# Altium PCB PCB.PcbDoc
Units mm, origin at the board's own origin, x right, y up, seen from the top; angles counter-clockwise.
Board outline 60.43 x 99.97 mm, 2 copper layers (Top Layer, Bottom Layer), stack 0.533 mm thick; 109 components, 71 nets, 350 pads, 354 vias.
Unrouted connection lines stored in the file: 10.
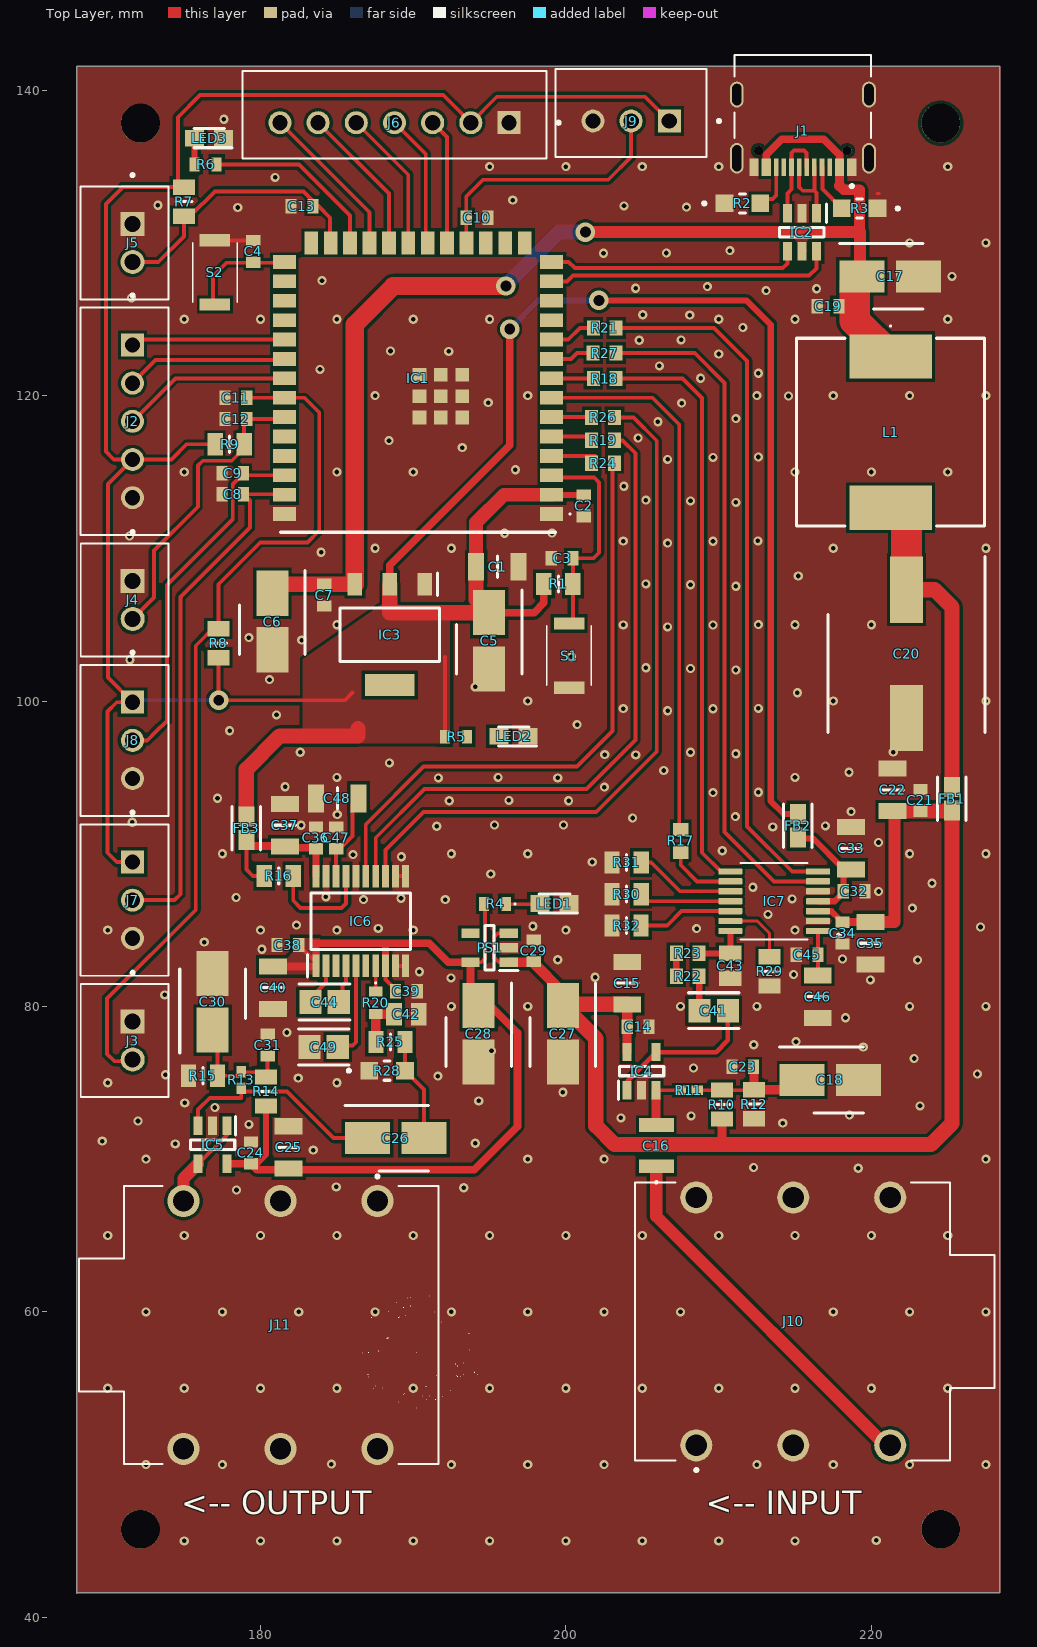
[diagram p0: Top Layer view]
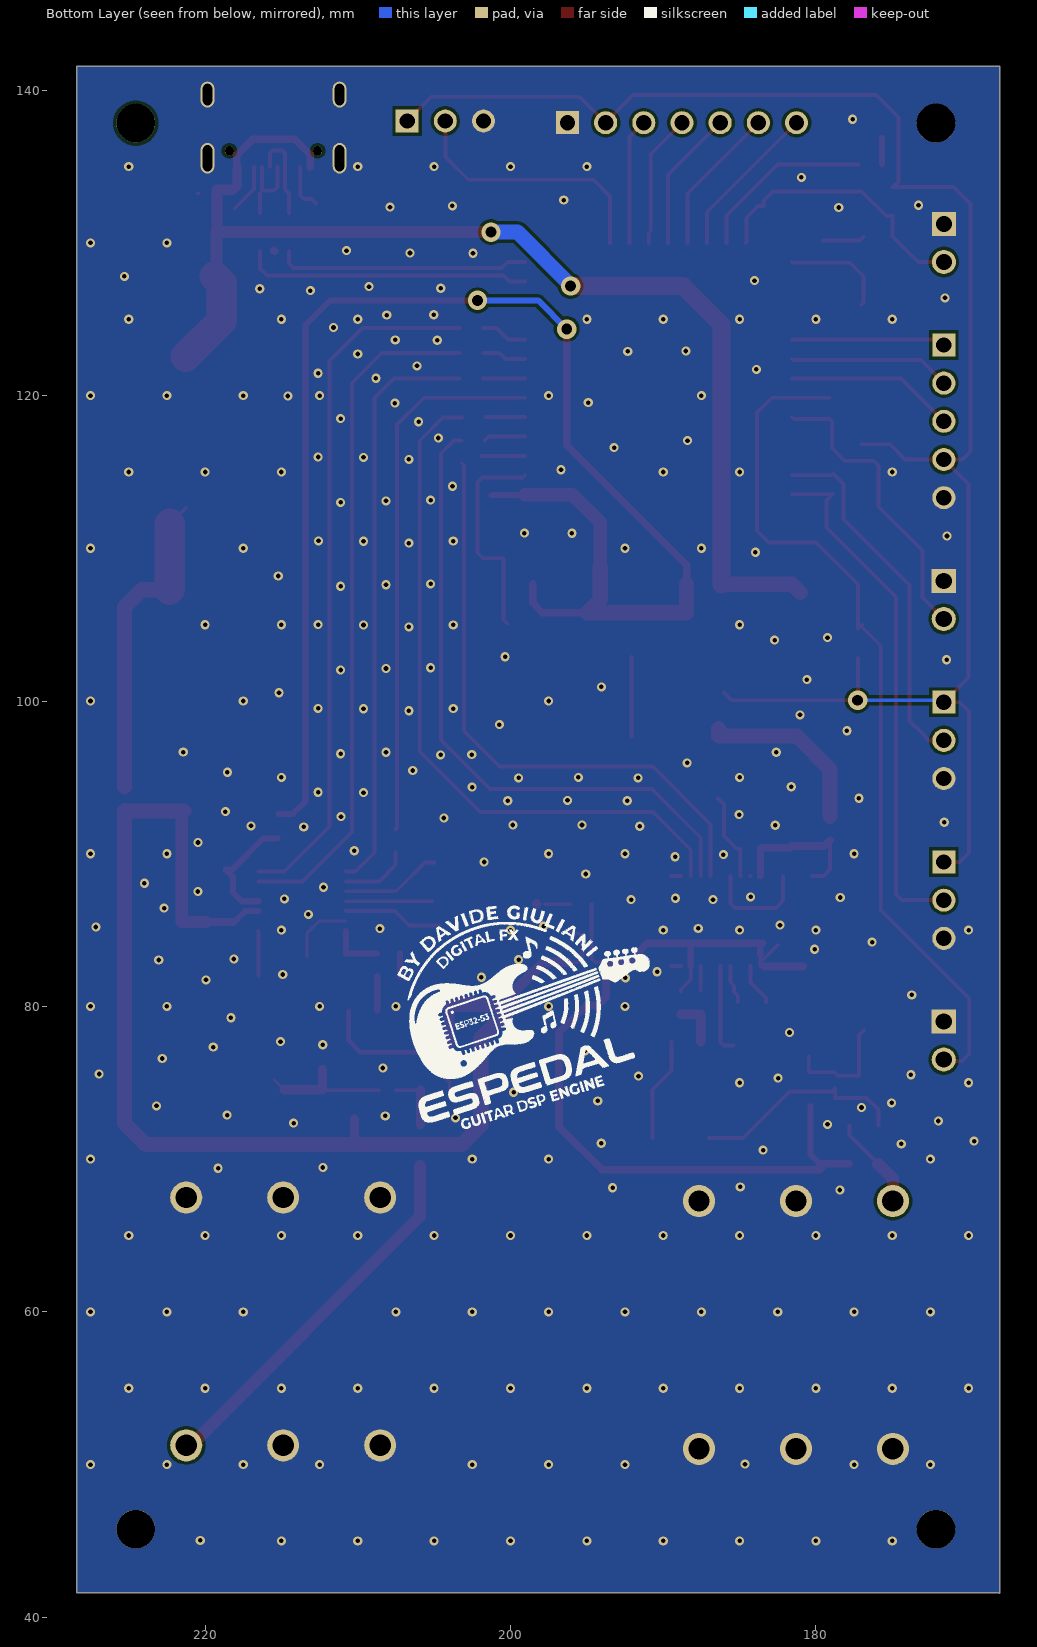
[diagram p1: Bottom Layer view, seen from below]
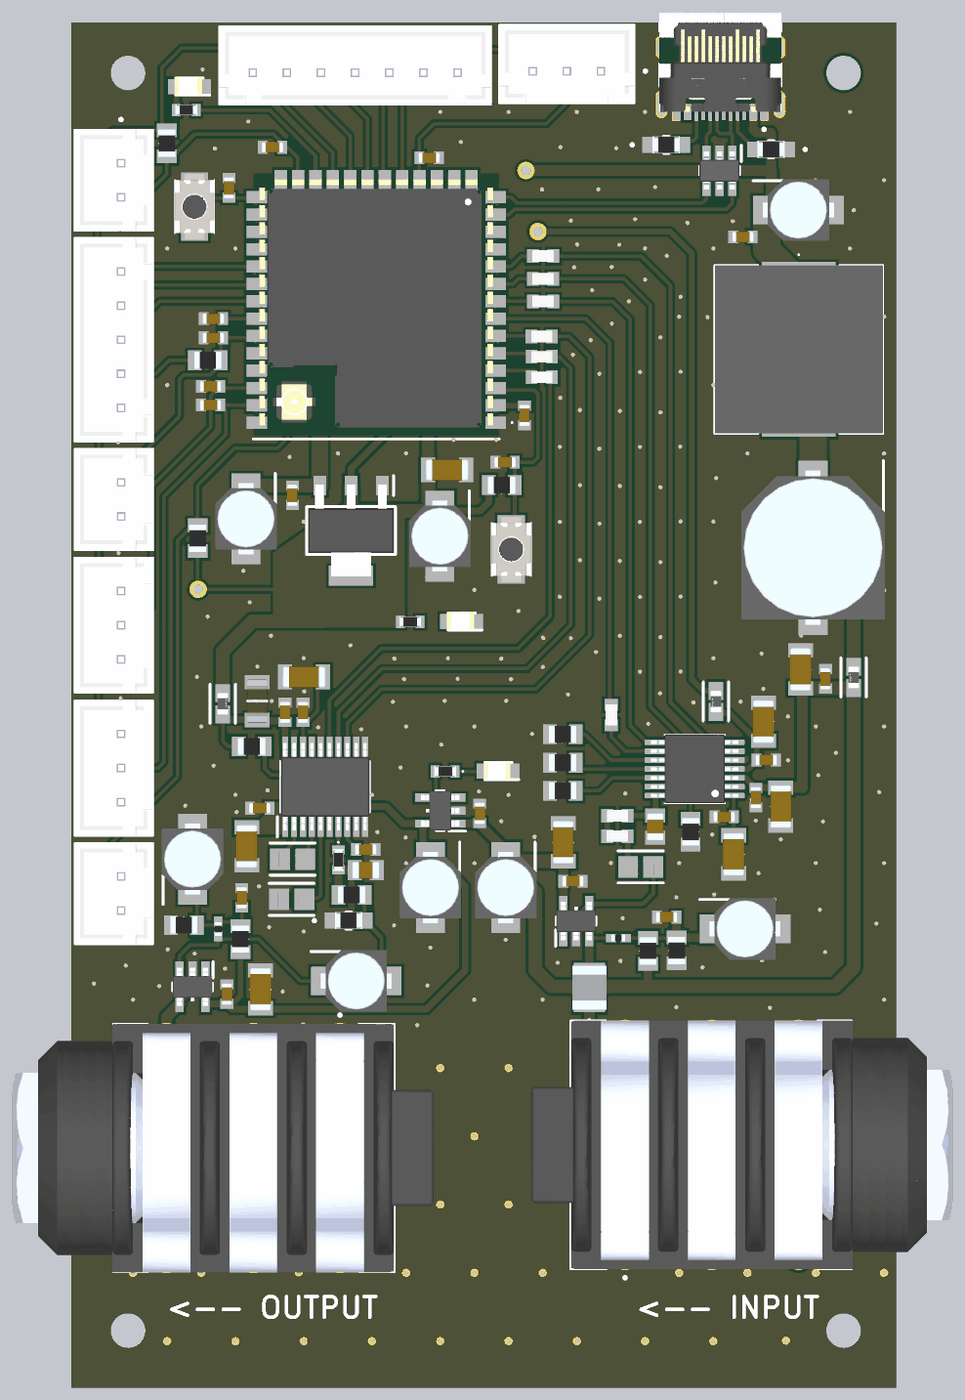
[diagram p2: 3D render of the assembled board from above, using the file's embedded part models]

## Layer stack, top to bottom
Top Solder: solder mask 0.0102, Solder Resist, Dk 3.5
Top Layer: signal copper 0.0356
Dielectric 2: prepreg 0.0711, PP-006, Dk 4.1
Dielectric 1: dielectric 0.32, FR-4, Dk 4.8
Dielectric 3: prepreg 0.0711, PP-006, Dk 4.1
Bottom Layer: signal copper 0.0356
Bottom Solder: solder mask 0.0102, Solder Resist, Dk 3.5

## Board outline
167.97,41.58 167.996,41.605 228.397,41.605 228.397,141.554 167.97,141.554

## Design rules (kind name [scope] priority, off if disabled: settings)
Clearance "Stitching GND" [IsStitchingVia and InNet('GND') vs (IsVia and (Not IsStitchingVia)) Or IsPad] p1: gap=0.3 ignorepadtopadclearanceinfootprint=FALSE
Clearance [All] p2: gap=0.2 ignorepadtopadclearanceinfootprint=FALSE
DiffPairsRouting [All] p1: maxlimit=0.254 minlimit=0.2 mostfreqgap=0.254 toplayer_minwidth=0.2 toplayer_maxwidth=0.254 toplayer_prefwidth=0.254 bottomlayer_minwidth=0.2 bottomlayer_maxwidth=0.254 bottomlayer_prefwidth=0.254 maxuncoupledlength=12.7
PolygonConnect [All] p1: connectstyle=Direct reliefconductorwidth=0.254 reliefentries=4 polygonreliefangle="90 Angle" airgapwidth=0.254
RoutingVias [All] p1: holewidth=0.711 width=1.27 viastyle="Through Hole" minholewidth=0.711 minwidth=1.27 maxholewidth=0.711 maxwidth=1.27
SolderMaskExpansion [All] p1: expansion=0 istentingtop=FALSE
SupplyNets "Schematic Supply Nets_5" [InNet('STATE')] p1: voltage=0.000
SupplyNets "Schematic Supply Nets_4" [InNet('+5V')] p2: voltage=0.000
SupplyNets "Schematic Supply Nets_3" [InNet('+3.3V_D')] p3: voltage=0.000
SupplyNets "Schematic Supply Nets_2" [InNet('GND')] p4: voltage=0.000
SupplyNets "Schematic Supply Nets_1" [InNet('+5V_A')] p5: voltage=0.000
SupplyNets "Schematic Supply Nets" [InNet('+3.3V_A')] p6: voltage=0.000
Width Width_Power [InNetClass('Power')] p1: maxlimit=2 minlimit=0.2 preferedwidth=0.6
Width [All] p2: maxlimit=0.8 minlimit=0.2 preferedwidth=0.254
29 further rules are at their usual default settings.

## Classes and differential pairs
net class POWER: +3.3V_A +3.3V_D +5V +5V_A GND NetC20_1
component class Mixed: C14 C15 C16 C17 C18 C19 C20 C21 C22 C23 C24 C25 C26 C27 C28 C29 C30 C31 C32 C33 C34 C35 C36 C37 C38 C39 C40 C41 C42 C43 C44 C45 C46 C47 C48 C49 FB1 FB2 FB3 IC4 IC5 IC6 IC7 J10 J11 L1 PS1 R10 R11 R12 R13 R14 R15 R16 R17 R18 R19 R20 R21 R22 R23 R24 R25 R26 R27 R28 R29 R30 R31 R32
component class Main: C1 C2 C3 C4 C5 C6 C7 C8 C9 C10 C11 C12 C13 IC1 IC2 IC3 J1 J2 J3 J4 J5 J6 J7 J8 J9 LED1 LED2 LED3 R1 R2 R3 R4 R5 R6 R7 R8 R9 S1 S2
differential pair NewDifferentialPair1: +D+ESP -D-ESP

## Components (designator, comment, footprint, x,y, rotation, side; value= is the part's Value field where it differs from the comment)
C1 "10uF" CAPC3216X180N 195.504,108.788 r180 top
C2 "100nF" CAPC1608X90N 201.168,112.776 r270 top
C3 "100nF" CAPC1608X90N 199.746,109.347 r180 top
C4 "100nF" CAPC1608X90N 179.527,129.44 r90 top
C5 "22uF" CAPAE430X590N 194.97,103.937 r270 top
C6 "22uF" CAPAE430X590N 180.772,105.207 r270 top
C7 "100nF" CAPC1608X90N 184.175,106.934 r270 top
C8 "100nF" CAPC1608X90N 178.182,113.538 r0 top
C9 "100nF" CAPC1608X90N 178.182,114.91 r0 top
C10 "100nF" CAPC1608X90N 194.183,131.648 r180 top
C11 "100nF" CAPC1608X90N 178.384,119.863 r0 top
C12 "100nF" CAPC1608X90N 178.384,118.466 r0 top
C13 "100nF" CAPC1608X90N 182.715,132.41 r0 top
C14 "100nF" CAPC1608X90N 204.723,78.664 r180 top
C15 "10uF" CAPC3216X180N 204.013,81.527 r270 top
C16 "100n" ECHU_G3_18 205.918,70.885 r90 top
C17 "22uF" CAPAE430X590N 221.23,127.813 r0 top
C18 "22uF" CAPAE430X590N 217.318,75.184 r0 top
C19 "100nF" CAPC1608X90N 217.17,125.857 r0 top
C20 "220u" CAPAE1030X1050N 222.301,103.09 r270 top
C21 "100nF" CAPC1608X90N 223.215,93.497 r270 top
C22 "10uF" CAPC3216X180N 221.386,94.183 r270 top
C23 "100nF" CAPC1608X90N 211.582,76.048 r0 top
C24 "100nF" CAPC1608X90N 179.375,70.409 r270 top
C25 "10uF" CAPC3216X180N 181.839,70.764 r270 top
C26 "22uF" CAPAE430X590N 188.849,71.374 r0 top
C27 "22uF" CAPAE430X590N 199.796,78.211 r270 top
C28 "22uF" CAPAE430X590N 194.285,78.211 r270 top
C29 "100nF" CAPC1608X90N 197.891,83.642 r270 top
C30 "22uF" CAPAE430X590N 176.86,80.294 r90 top
C31 "100nF" CAPC1608X90N 180.467,77.47 r270 top
C32 "100nF" CAPC1608X90N 218.872,87.544 r180 top
C33 "10uF" CAPC3216X180N 218.669,90.356 r270 top
C34 "100nF" CAPC1608X90N 218.11,84.802 r90 top
C35 "10uF" CAPC3216X180N 219.939,84.14 r90 top
C36 "100nF" CAPC1608X90N 183.631,91.034 r270 top
C37 "10uF" CAPC3216X180N 181.599,91.867 r270 top
C38 "100nF" CAPC1608X90N 181.788,84.023 r0 top
C39 "100nF" CAPC1608X90N 189.548,81.003 r180 top
C40 "10uF" CAPC3216X180N 180.823,81.229 r90 top
C41 "2.2uF" FP-CL21-IPC_A 209.677,79.72 r180 top
C42 "10nF" CAPC2012X94N 189.548,79.479 r180 top
C43 "10nF" CAPC2012X94N 210.744,82.667 r90 top
C44 "2.2uF" FP-CL21-IPC_A 184.19,80.291 r180 top
C45 "100nF" CAPC1608X90N 215.794,83.389 r0 top
C46 "10uF" CAPC3216X180N 216.484,80.642 r90 top
C47 "100nF" CAPC1608X90N 184.952,91.034 r270 top
C48 "10uF" CAPC3216X180N 185.028,93.626 r0 top
C49 "2.2uF" FP-CL21-IPC_A 184.125,77.343 r180 top
FB1 "600Ω @ 100MHz" FP-BLM18-0_15-t0_8-IPC_A 225.273,93.599 r270 top
FB2 "600Ω @ 100MHz" FP-BLM18-0_15-t0_8-IPC_A 215.189,91.836 r270 top
FB3 "600Ω @ 100MHz" FP-BLM18-0_15-t0_8-IPC_A 179.07,91.669 r90 top
IC1 "ESP32-S3-WROOM-1U-N16R8" ESP32S3WROOM1UN16R8 190.309,120.653 r180 top
IC2 "USBLC6-2SC6" SOT95P280X145-6N 215.448,130.699 r270 top
IC3 "AMS1117-3.3" SOT229P700X180-4N 188.468,104.343 r270 top
IC4 "OPA1671IDBVR" SOT95P280X145-5N 204.953,75.763 r90 top
IC5 "OPA1671IDBVR" SOT95P280X145-5N 176.86,70.942 r270 top
IC6 "PCM5102APW" SOP65P640X120-20N 186.568,85.594 r90 top
IC7 "PCM1808PWR" SOP65P640X120-14N 213.632,86.892 r180 top
J1 "TYPE-C-31-M-12" HRO_TYPE-C-31-M-12 215.517,139.716 r180 top
J2 "B5B-XH-A" JST_B5B-XH-A 171.094,118.317 r90 top
J3 "B2B-XH-A_(LF)(SN)" JST_B2B-XH-A_(LF)(SN) 171.103,77.769 r90 top
J4 "B2B-XH-A_(LF)(SN)" JST_B2B-XH-A_(LF)(SN) 171.103,106.624 r90 top
J5 "B2B-XH-A_(LF)(SN)" JST_B2B-XH-A_(LF)(SN) 171.094,129.997 r90 top
J6 "B7B-XH-A" JST_B7B-XH-A 188.769,138.396 r0 top
J7 "B3B-XH-A(LF)(SN)" JST_B3B-XH-A(LF)(SN) 171.094,86.959 r90 top
J8 "B3B-XH-A(LF)(SN)" JST_B3B-XH-A(LF)(SN) 171.094,97.424 r90 top
J9 "B3B-XH-A(LF)(SN)" JST_B3B-XH-A(LF)(SN) 204.267,138.506 r0 top
J10 "NMJ6HCD2-SM" NEUTRIK_NMJ6HCD2 214.884,59.372 r180 top
J11 "NMJ6HCD2-SM" NEUTRIK_NMJ6HCD2 181.305,59.144 r0 top
L1 "SMDRI127-221MT" SMDRI127221MT 221.259,117.605 r0 top
LED1 "LTST-C171KRKT" LEDM2012X90N 199.249,86.741 r180 top
LED2 "LTST-C171KRKT" LEDM2012X90N 196.571,97.688 r180 top
LED3 "LTST-C171KRKT" LEDM2012X90N 176.632,136.855 r180 top
PS1 "LP5907MFX-3.0_NOPB" SOT95P280X145-5N 194.996,83.845 r180 top
R1 "10K" RESC2012X60N 199.502,107.671 r180 top
R2 "5.1k" ERA6AEB101V 211.557,132.588 r0 top
R3 "5.1k" ERA6AEB101V 219.227,132.258 r180 top
R4 "470" ERA3AEB101V 195.363,86.716 r180 top
R5 "470" ERA3AEB101V 192.8,97.663 r180 top
R6 "470" ERA3AEB101V 176.403,135.14 r0 top
R7 "10K" RESC2012X60N 174.981,132.7 r90 top
R8 "10K" RESC2012X60N 177.241,103.784 r270 top
R9 "10K" RESC2012X60N 177.978,116.815 r180 top
R10 "10K" RESC2012X60N 210.21,73.574 r270 top
R11 "1M" RESC1005X40N 208.051,74.513 r0 top
R12 "10K" RESC2012X60N 212.319,73.599 r90 top
R13 "1M" RESC1005X40N 178.74,75.184 r90 top
R14 "10K" RESC2012X60N 180.365,74.437 r270 top
R15 "10K" RESC2012X60N 176.225,75.463 r0 top
R16 "10K" RESC2012X60N 181.193,88.544 r180 top
R17 "47" RESC1608X50N 207.518,90.844 r90 top
R18 "47" RESC1608X50N 202.538,121.118 r180 top
R19 "47" RESC1608X50N 202.438,117.069 r0 top
R20 "470" ERA3AEB101V 187.543,80.241 r270 top
R21 "47" RESC1608X50N 202.54,124.435 r180 top
R22 "47" RESC1608X50N 207.975,81.981 r180 top
R23 "47" RESC1608X50N 207.975,83.48 r0 top
R24 "47" RESC1608X50N 202.438,115.57 r0 top
R25 "10K" RESC2012X60N 188.509,77.673 r180 top
R26 "47" RESC1608X50N 202.426,118.567 r0 top
R27 "47" RESC1608X50N 202.528,122.784 r0 top
R28 "5.1k" ERA6AEB101V 188.284,75.794 r0 top
R29 "10K" RESC2012X60N 213.335,82.296 r90 top
R30 "10K" RESC2012X60N 203.971,87.351 r0 top
R31 "10K" RESC2012X60N 203.971,89.433 r0 top
R32 "10K" RESC2012X60N 203.971,85.293 r0 top
S1 "SKRKAEE020" SKRKAEE020 200.203,102.972 r90 top
S2 "SKRKAEE020" SKRKAEE020 177.013,128.067 r270 top

## Footprints (in the part's own frame and the unit in brackets; to place one, negate y for a bottom-side part, rotate by r counter-clockwise, add the part's x,y. Pads: shape width x height; smd on the part's side, far side on the other; paste and mask are expansions set on the pad)
CAPAE430X590N [mm]
  rect 2.95x2.1 smd: 1(-1.85,0) 2(1.85,0)
  silkscreen extent -3.32,-2.15 2.15,2.15, body extent -2.6,-2.25 2.6,2.25, height 5.9
CAPAE1030X1050N [mm]
  rect 4.35x2.15 smd: 1(-4.2,0) 2(4.2,0)
  silkscreen extent -6.38,-5.15 5.15,5.15, body extent -5.65,-5.25 5.65,5.25, height 10.5
CAPC1608X90N [mm]
  rect 0.73x0.94 smd: 1(-0.71,0) 2(0.71,0)
  body extent -0.8,-0.4 0.8,0.4, height 0.9
CAPC2012X94N [mm]
  rect 1.02x1.47 smd: 1(-0.81,0) 2(0.81,0)
  body extent -1,-0.63 1,0.63, height 0.94
CAPC3216X180N [mm]
  rect 1.05x1.82 smd: 1(-1.39,0) 2(1.39,0)
  silkscreen extent 0,-0.7 0,0.7, body extent -1.6,-0.8 1.6,0.8, height 1.8
ECHU_G3_18 [mm]
  rect 0.9x2.3 smd: 1(-1.35,0) 2(1.35,0)
  silkscreen extent -2.45,-0.05 -2.35,0.05, body extent -1.6,-1.25 1.6,1.25, height 1.5
ERA3AEB101V [mm]
  rect 0.65x0.9 smd: 1(-0.725,0) 2(0.725,0)
  silkscreen extent -1.35,-0.05 -1.25,0.05, body extent -0.8,-0.4 0.8,0.4, height 0.45
ERA6AEB101V [mm]
  rect 1.15x1.15 smd: 1(-1.175,0) 2(1.175,0)
  silkscreen extent -2.6,-0.62 0.2,0.62, body extent -1,-0.63 1,0.63, height 0.5
ESP32S3WROOM1UN16R8 [mm]
  rect 1.5x0.9 smd: 1(-8.75,8.41) 2(-8.75,7.14) 3(-8.75,5.87) 4(-8.75,4.6) 5(-8.75,3.33) 6(-8.75,2.06) 7(-8.75,0.79) 8(-8.75,-0.48) 9(-8.75,-1.75) 10(-8.75,-3.02) 11(-8.75,-4.29) 12(-8.75,-5.56) 13(-8.75,-6.83) 14(-8.75,-8.1) 27(8.75,-8.1) 28(8.75,-6.83) 29(8.75,-5.56) 30(8.75,-4.29) 31(8.75,-3.02) 32(8.75,-1.75) 33(8.75,-0.48) 34(8.75,0.79) 35(8.75,2.06) 36(8.75,3.33) 37(8.75,4.6) 38(8.75,5.87) 39(8.75,7.14) 40(8.75,8.41)
  rect 0.9x1.5 smd: 15(-6.985,-9.35) 16(-5.715,-9.35) 17(-4.445,-9.35) 18(-3.175,-9.35) 19(-1.905,-9.35) 20(-0.635,-9.35) 21(0.635,-9.35) 22(1.905,-9.35) 23(3.175,-9.35) 24(4.445,-9.35) 25(5.715,-9.35) 26(6.985,-9.35)
  rect 0.9x0.9 smd: 41(-1.5,0.69) 42(-1.5,2.09) 43(-2.9,2.09) 44(-2.9,0.69) 45(-2.9,-0.71) 46(-1.5,-0.71) 47(-0.1,-0.71) 48(-0.1,0.69) 49(-0.1,2.09)
  silkscreen extent -10,8.35 9,9.6, body extent -9,-9.85 9,9.35, height 3.35
FP-BLM18-0_15-t0_8-IPC_A [mm]
  rect 1.306x1.058 smd paste+0 mask+0: 1(-0.776,0) 2(0.776,0)
  silkscreen extent -1.43,-0.93 1.43,0.93, body extent -0.8,-0.4 0.8,0.4, height 0.95
FP-CL21-IPC_A [mm]
  rect 1.455x1.556 smd paste+0 mask+0: 1(-0.926,0) 2(0.926,0)
  silkscreen extent -1.65,-1.18 1.65,1.18, body extent -2.15,-1.28 2.15,1.28, height 0.25
HRO_TYPE-C-31-M-12 [mm]
  rect 0.6x1.14 smd mask+0.05: A1_B12(-3.2,4.75) A4_B9(-2.4,4.75) B1_A12(3.2,4.75) B4_A9(2.4,4.75)
  rect 0.3x1.14 smd mask+0.05: A5(-1.25,4.75) A6(-0.25,4.75) A7(0.25,4.75) A8(1.25,4.75) B5(1.75,4.75) B6(0.75,4.75) B7(-0.75,4.75) B8(-1.75,4.75)
  oval 0.9x2 hole 0.6 slot 1.7 at 90 deg: S1(-4.325,4.17) S2(4.325,4.17)
  oval 0.9x1.7 hole 0.6 slot 1.4 at 90 deg: S3(-4.325,0) S4(4.325,0)
  round 0.6 hole 0.6 unplated: ""(-2.89,3.68) ""(2.89,3.68)
  silkscreen extent -4.47,-2.6 4.47,6.1, body extent -4.47,-2.6 4.47,5.31, height 3.31
JST_B2B-XH-A_(LF)(SN) [mm]
  rect 1.575x1.575 / inner round 1.575 / far side rect 1.575x1.575 hole 1.05: 1(1.25,-0.525)
  round 1.575 hole 1.05: 2(-1.25,-0.525)
  silkscreen extent -3.7,-2.88 4.54,2.87, body extent -3.7,-2.88 3.7,2.88, height 7
JST_B3B-XH-A(LF)(SN) [mm]
  rect 1.508x1.508 / inner round 1.508 / far side rect 1.508x1.508 hole 1 mask+0.102: 1(2.5,-0.525)
  round 1.508 hole 1 mask+0.102: 2(0,-0.525) 3(-2.5,-0.525)
  silkscreen extent -4.95,-2.88 5.85,2.87, body extent -4.95,-2.88 4.95,2.88, height 7
JST_B5B-XH-A [mm]
  rect 1.508x1.508 / inner round 1.508 / far side rect 1.508x1.508 hole 1: 1(5,-0.525)
  round 1.508 hole 1: 2(2.5,-0.525) 3(0,-0.525) 4(-2.5,-0.525) 5(-5,-0.525)
  silkscreen extent -7.45,-2.88 8.35,2.87, body extent -7.45,-2.88 7.45,2.88, height 7
JST_B7B-XH-A [mm]
  rect 1.508x1.508 / inner round 1.508 / far side rect 1.508x1.508 hole 1: 1(7.5,-0.525)
  round 1.508 hole 1: 2(5,-0.525) 3(2.5,-0.525) 4(0,-0.525) 5(-2.5,-0.525) 6(-5,-0.525) 7(-7.5,-0.525)
  silkscreen extent -9.95,-2.88 10.85,2.87, body extent -9.95,-2.88 9.95,2.88, height 7
LEDM2012X90N [mm]
  rect 1.25x1.1 smd: 1(-0.95,0) 2(0.95,0)
  silkscreen extent -1.5,-0.62 1,0.62, body extent -0.9,-0.67 1.1,0.58, height 1.16
NEUTRIK_NMJ6HCD2 [mm]
  round 2.1 hole 1.4: 1(6.35,-8.115) 2(0,-8.115) 3(-6.35,-8.115) 5(6.35,8.115) 6(0,8.115) 7(-6.35,8.115)
  silkscreen extent -13.18,-9.1 10.35,9.83, body extent -17.64,-9.1 13.23,9.1, height 15.67
RESC1005X40N [mm]
  rect 0.75x0.6 smd: 1(-0.55,0) 2(0.55,0)
  body extent -0.5,-0.25 0.5,0.25, height 0.4
RESC1608X50N [mm]
  rect 0.85x1 smd: 1(-0.75,0) 2(0.75,0)
  body extent -0.77,-0.43 0.78,0.42, height 0.45
RESC2012X60N [mm]
  rect 1x1.45 smd: 1(-0.95,0) 2(0.95,0)
  silkscreen extent 0,-0.52 0,0.53, body extent -1,-0.63 1,0.63, height 0.6
SKRKAEE020 [mm]
  rect 0.8x2 smd: 1(-2.1,0) 2(2.1,0)
  silkscreen extent -1.95,-1.45 1.95,1.45, body extent -2.4,-1.45 2.4,1.45, height 2
SMDRI127221MT [mm]
  rect 5.4x2.9 smd: 1(0,4.95) 2(0,-4.95)
  silkscreen extent -6.15,-6.15 6.15,7, body extent -6.15,-6.15 6.15,6.15, height 8.1
SOP65P640X120-14N [mm]
  rrect25% 1.57x0.41 smd: 1(-2.87,1.95) 2(-2.87,1.3) 3(-2.87,0.65) 4(-2.87,0) 5(-2.87,-0.65) 6(-2.87,-1.3) 7(-2.87,-1.95) 8(2.87,-1.95) 9(2.87,-1.3) 10(2.87,-0.65) 11(2.87,0) 12(2.87,0.65) 13(2.87,1.3) 14(2.87,1.95)
  silkscreen extent -4.34,-2.5 2.2,2.5, body extent -3.2,-2.5 3.2,2.5, height 1.2
SOP65P640X120-20N [mm]
  rect 1.475x0.45 smd: 1(-2.938,2.925) 2(-2.938,2.275) 3(-2.938,1.625) 4(-2.938,0.975) 5(-2.938,0.325) 6(-2.938,-0.325) 7(-2.938,-0.975) 8(-2.938,-1.625) 9(-2.938,-2.275) 10(-2.938,-2.925) 11(2.938,-2.925) 12(2.938,-2.275) 13(2.938,-1.625) 14(2.938,-0.975) 15(2.938,-0.325) 16(2.938,0.325) 17(2.938,0.975) 18(2.938,1.625) 19(2.938,2.275) 20(2.938,2.925)
  silkscreen extent -3.67,-3.25 1.85,3.5, body extent -3.2,-3.25 3.2,3.25, height 1.13
SOT95P280X145-5N [mm]
  rect 1.2x0.6 smd: 1(-1.25,0.95) 2(-1.25,0) 3(-1.25,-0.95) 4(1.25,-0.95) 5(1.25,0.95)
  silkscreen extent -1.85,-1.45 0.3,1.5, body extent -1.4,-1.45 1.4,1.45, height 1.2
SOT95P280X145-6N [mm]
  rect 1.2x0.6 smd: 1(-1.25,0.95) 2(-1.25,0) 3(-1.25,-0.95) 4(1.25,-0.95) 5(1.25,0) 6(1.25,0.95)
  silkscreen extent -1.85,-1.46 0.3,1.6, body extent -1.4,-1.46 1.4,1.46, height 1.45
SOT229P700X180-4N [mm]
  rect 1.45x0.95 smd: 1(-3.3,2.29) 2(-3.3,0) 3(-3.3,-2.29)
  rect 1.45x3.25 smd: 4(3.3,0)
  silkscreen extent -4.02,-3.25 1.75,3.25, body extent -3.35,-3.15 3.35,3.15, height 1.8

## Part data
C1 C15 C22 C25 C33 C35 C37 C40 C46 C48: library part CL31A106KAHNNNE, "Capacitor", Manufacturer_Name=SAMSUNG, Mouser Part Number=187-CL31A106KAHNNNE, Arrow Part Number=CL31A106KAHNNNE, Arrow Price/Stock=https://www.arrow.com/en/products/cl31a106kahnnne/samsung-electro-mechanics?utm_currency=USD&region=europe, Datasheet Link=https://datasheet.datasheetarchive.com/originals/distributors/Datasheets_SAMA/8c86add0e95aa125c91e23e767429ce6.pdf, Height=1.8mm, Manufacturer_Part_Number=CL31A106KAHNNNE, Mouser Price/Stock=https://www.mouser.co.uk/ProductDetail/Samsung-Electro-Mechanics/CL31A106KAHNNNE?qs=349EhDEZ59rSHw4%2FqTnHBg%3D%3D
C2 C3 C4 C7 C8 C9 C10 C11 C12 C13 C14 C19 C21 C23 C24 C29 C31 C32 C34 C36 C38 C39 C45 C47: library part CL10B104KC8NNNC, "Capacitor", Manufacturer_Name=SAMSUNG, Mouser Part Number=187-CL10B104KC8NNNC, Arrow Part Number=CL10B104KC8NNNC, Arrow Price/Stock=https://www.arrow.com/en/products/cl10b104kc8nnnc/samsung-electro-mechanics?utm_currency=USD&region=europe, Datasheet Link=https://datasheet.datasheetarchive.com/originals/distributors/DKDS-19/373511.pdf, Height=0.9mm, Manufacturer_Part_Number=CL10B104KC8NNNC, Mouser Price/Stock=https://www.mouser.co.uk/ProductDetail/Samsung-Electro-Mechanics/CL10B104KC8NNNC?qs=%2FukktrhNKsY5bKXvqblW4Q%3D%3D
C5 C6 C17 C18 C26 C27 C28 C30: library part RVT1C220M0405, "Capacitor Polarised", Manufacturer_Name=ROQANG, Datasheet Link=https://wmsc.lcsc.com/wmsc/upload/file/pdf/v2/lcsc/2304140030_CX-Dongguan-Chengxing-Elec-RVT1C220M0405_C81984.pdf, Height=5.9mm, Manufacturer_Part_Number=RVT1C220M0405
C16: library part ECH-U1C104GX5, "Capacitor", Manufacturer_Name=Panasonic, Mouser Part Number=667-ECH-U1C104GX5, Arrow Part Number=ECH-U1C104GX5, Arrow Price/Stock=https://www.arrow.com/en/products/echu1c104gx5/panasonic?utm_currency=USD&region=nac, Datasheet Link=http://industrial.panasonic.com/cdbs/www-data/pdf/RDI0000/ABD0000C173.pdf, Manufacturer_Part_Number=ECH-U1C104GX5, Mouser Price/Stock=https://www.mouser.co.uk/ProductDetail/Panasonic/ECH-U1C104GX5?qs=b%252BB9euYP3EMEWVbLst4WHA%3D%3D
C20: library part UWT1H221MNL1GS, "Capacitor Polarised", Manufacturer_Name=Nichicon, Mouser Part Number=647-UWT1H221MNL1S, Arrow Part Number=UWT1H221MNL1GS, Arrow Price/Stock=https://www.arrow.com/en/products/uwt1h221mnl1gs/nichicon?utm_currency=USD&region=europe, Datasheet Link=http://www.nichicon.co.jp/english/products/pdfs/e-uwt.pdf, Height=10.5mm, Manufacturer_Part_Number=UWT1H221MNL1GS, Mouser Price/Stock=https://www.mouser.co.uk/ProductDetail/Nichicon/UWT1H221MNL1GS?qs=X14clCvG9QkA%252BkRMafMHPw%3D%3D
C41 C44 C49: library part CMP-13271-000865-1, "CL21 Series 0805 2.2uF 50V ±10% Tolerance X7R Multilayer Ceramic Chip Capacitor", Manufacturer_Part_Number=CL21B225KBYNNNE
C42 C43: library part 08055C103KAT2A, "Capacitor", Manufacturer_Name="Kyocera AVX", Mouser Part Number=581-08055C103K, Arrow Part Number=08055C103KAT2A, Arrow Price/Stock=https://www.arrow.com/en/products/08055c103kat2a/avx?region=nac, Datasheet Link=http://datasheets.avx.com/X7RDielectric.pdf, Height=0.94mm, Manufacturer_Part_Number=08055C103KAT2A, Mouser Price/Stock=https://www.mouser.co.uk/ProductDetail/KYOCERA-AVX/08055C103KAT2A?qs=rjW0lv%2FNY4M71vZO8r6Lsw%3D%3D
FB1 FB2 FB3: library part CMP-0686-00354-3, "p", Case Code (Imperial)=0603, Case Code (Metric)=1608, Current Rating=500mA, DC Resistance (DCR)=350mR, Frequency=100MHz, Manufacturer Series=BLM18E, Manufacturer_Part_Number=BLM18BD601SN1D, Max Operating Temperature=125°C, Min Operating Temperature=-55°C, Package Quantity=1, Tolerance=25%, Case/Package=0603, Contact Plating=Tin, Core Material=Ferrite, DC Current=500mA, DC Resistance-Max=350mR, Depth=0.8mm, Height=0.8mm, Impedance=600R, Lead Free="Lead Free", Length=1.6mm, Material=Steel, Max Current Rating=500mA, Max DC Current=500mA, Military Standard=Not, Number of Circuits=1, Number of Functions=1, Number of Lines=1, Number of Pins=2, Packaging="Tape and Reel", Radiation Hardening=No, REACH SVHC="No SVHC", Resistance=350mR, RoHS Compliant=Yes, Series=BLM18E, Shielding=Unshielded, Terminal Finish=Tin, Termination=SMD/SMT, Test Frequency=100MHz, Width=0.8mm
IC1: "Integrated Circuit", Manufacturer_Name="Espressif Systems", Mouser Part Number=356-ESP32S3WM1UN16R8, Datasheet Link=https://www.espressif.com/sites/default/files/documentation/esp32-s3-wroom-1_wroom-1u_datasheet_en.pdf, Height=3.35mm, Manufacturer_Part_Number=ESP32-S3-WROOM-1U-N16R8, Mouser Price/Stock=https://www.mouser.co.uk/ProductDetail/Espressif-Systems/ESP32-S3-WROOM-1U-N16R8?qs=Li%252BoUPsLEns6V0Pr5KRJtw%3D%3D
IC2: "Integrated Circuit", Manufacturer_Name=STMicroelectronics, Mouser Part Number=511-USBLC6-2SC6, Arrow Part Number=USBLC6-2SC6, Arrow Price/Stock=https://www.arrow.com/en/products/usblc6-2sc6/stmicroelectronics.html?utm_currency=USD&region=nac, Datasheet Link=https://www.st.com/resource/en/datasheet/usblc6-2.pdf, Height=1.45mm, Manufacturer_Part_Number=USBLC6-2SC6, Mouser Price/Stock=https://www.mouser.co.uk/ProductDetail/STMicroelectronics/USBLC6-2SC6?qs=po45yt2pPpu%2FhNIlwQdTlg%3D%3D
IC3: "Integrated Circuit", Manufacturer_Name=Advanced, Datasheet Link=https://datasheet.datasheetarchive.com/originals/distributors/Datasheets-28/DSA-550594.pdf, Height=1.8mm, Manufacturer_Part_Number=AMS1117-3.3
IC4 IC5: "Mechanical Part", Manufacturer_Name="Texas Instruments", Mouser Part Number=595-OPA1671IDBVR, Datasheet Link=https://www.ti.com/lit/gpn/OPA1671, Height=1.45mm, Manufacturer_Part_Number=OPA1671IDBVR, Mouser Price/Stock=https://www.mouser.co.uk/ProductDetail/Texas-Instruments/OPA1671IDBVR?qs=XeJtXLiO41SGLYFOORSwuw%3D%3D
IC6: "Integrated Circuit", Manufacturer_Name="Texas Instruments", Manufacturer_Part_Number=PCM5102APWR, Mouser Part Number=595-PCM5102APW, Arrow Part Number=PCM5102APW, Arrow Price/Stock=https://www.arrow.com/en/products/pcm5102apw/texas-instruments?utm_currency=USD&region=nac, Datasheet Link=http://www.ti.com/lit/gpn/PCM5102A, Height=1.2mm, Mouser Price/Stock=https://www.mouser.co.uk/ProductDetail/Texas-Instruments/PCM5102APW?qs=E2%2FxqS9xjzqNHu82%252Bs583Q%3D%3D
IC7: "24-bit, 99-dB SNR, 96-kHz stereo ADC with single-ended inputs", Package="TSSOP-14 Texas Instruments", Check_prices=https://www.snapeda.com/parts/PCM1808PWR/Texas+Instruments/view-part/?ref=eda, Manufacturer_Part_Number=PCM1808PWR, MF="Texas Instruments", MP=PCM1808PWR, SnapEDA_Link=https://www.snapeda.com/parts/PCM1808PWR/Texas+Instruments/view-part/?ref=snap
J1: "USB Connectors 24 Receptacle 1 8.94*7.3mm RoHS", Package=Package, Check_prices=https://www.snapeda.com/parts/TYPE-C-31-M-12/HRO+Electronics+Co.%252C+Ltd./view-part/?ref=eda, Manufacturer_Part_Number=TYPE-C-31-M-12, MF="HRO Electronics Co., Ltd.", MP=TYPE-C-31-M-12, SnapEDA_Link=https://www.snapeda.com/parts/TYPE-C-31-M-12/HRO+Electronics+Co.%252C+Ltd./view-part/?ref=snap
J2: "Connector Header Through Hole 5 position 0.098 (2.50mm)", Package=None, Check_prices=https://www.snapeda.com/parts/B5B-XH-A/JST+Sales+America+Inc./view-part/?ref=eda, MF="JST Sales", MP=B5B-XH-A, SnapEDA_Link=https://www.snapeda.com/parts/B5B-XH-A/JST+Sales+America+Inc./view-part/?ref=snap
J3 J4 J5: "Connector Header Through Hole 2 position 0.098 (2.50mm)", Package=None, Check_prices=https://www.snapeda.com/parts/B2B-XH-A%20(LF)(SN)/JST+Sales+America+Inc./view-part/?ref=eda, MF="JST Sales", MP="B2B-XH-A (LF)(SN)", SnapEDA_Link=https://www.snapeda.com/parts/B2B-XH-A%20(LF)(SN)/JST+Sales+America+Inc./view-part/?ref=snap
J6: "Connector Header Through Hole 7 position 0.098 (2.50mm)", Package=None, Check_prices=https://www.snapeda.com/parts/B7B-XH-A/JST+Sales+America+Inc./view-part/?ref=eda, MF="JST Sales", MP=B7B-XH-A, SnapEDA_Link=https://www.snapeda.com/parts/B7B-XH-A/JST+Sales+America+Inc./view-part/?ref=snap
J7 J8 J9: "Connector Header Through Hole 3 position 0.098 (2.50mm)", Package=None, Check_prices=https://www.snapeda.com/parts/B3B-XH-A(LF)(SN)/JST/view-part/?ref=eda, MF="JST Sales", MP=B3B-XH-A(LF)(SN), SnapEDA_Link=https://www.snapeda.com/parts/B3B-XH-A(LF)(SN)/JST/view-part/?ref=snap
J10 J11: "Connector", Manufacturer_Name=Neutrik, Mouser Part Number=568-NMJ6HCD2-SM, Datasheet Link=https://www.neutrik.com/media/8582/download/st-nmj6hcd2.PDF?v=3, Height=15.67mm, Manufacturer_Part_Number=NMJ6HCD2-SM, Mouser Price/Stock=https://www.mouser.co.uk/ProductDetail/Neutrik/NMJ6HCD2-SM?qs=%252B86TLfaev2%252Bdu3o1dNpRRg%3D%3D
L1: "Inductor", Manufacturer_Name="Shun Xiang Nuo Elec", Datasheet Link=https://datasheet.lcsc.com/szlcsc/ShunXiang-Connaught-Elec-SMDRI127-221MT_C10151.pdf, Height=8mm, Manufacturer_Part_Number=SMDRI127-221MT
LED1 LED2 LED3: "LED", Manufacturer_Name=Lite-On, Mouser Part Number=859-LTST-C171KRKT, Arrow Part Number=LTST-C171KRKT, Arrow Price/Stock=https://www.arrow.com/en/products/ltst-c171krkt/lite-on-technology?utm_currency=USD&region=nac, Datasheet Link=http://www.mouser.com/datasheet/2/239/Lite-On-LTST-C171KRKT-1175280.pdf, Height=0.9mm, Manufacturer_Part_Number=LTST-C171KRKT, Mouser Price/Stock=https://www.mouser.co.uk/ProductDetail/LITEON/LTST-C171KRKT?qs=5XMAZBf2SiSTcAb1f5vDzw%3D%3D
PS1: "Power Supply", Arrow Part Number=LP5907MFX-3.0/NOPB, Manufacturer_Name="Texas Instruments", Mouser Part Number=595-LP5907MFX-3.0NPB, Arrow Price/Stock=https://www.arrow.com/en/products/lp5907mfx3-0-nopb/texas-instruments.html?utm_currency=USD&region=asia, Datasheet Link=http://www.ti.com/lit/gpn/lp5907, Height=1.45mm, Manufacturer_Part_Number=LP5907MFX-3.0/NOPB, Mouser Price/Stock=https://www.mouser.co.uk/ProductDetail/Texas-Instruments/LP5907MFX-3.0-NOPB?qs=biyDIajrTn4AH69D%252B0PS1g%3D%3D
R1 R7 R8 R9 R10 R12 R14 R15 R16 R25 R29 R30 R31 R32: library part AC0805JR-0710KL, "Resistor", Manufacturer_Name="Yageo Group", Mouser Part Number=603-AC0805JR-0710KL, Datasheet Link=https://www.yageo.com/upload/media/product/productsearch/datasheet/rchip/PYu-AC_51_RoHS_L_10.pdf, Height=0.6mm, Manufacturer_Part_Number=AC0805JR-0710KL, Mouser Price/Stock=https://www.mouser.co.uk/ProductDetail/YAGEO/AC0805JR-0710KL?qs=ygRr%2Ftkhtes%252BG%252B8d7tcP9w%3D%3D
R2 R3 R28: library part ERA-6AED512V, "Resistor", Manufacturer_Name=Panasonic, Mouser Part Number=667-ERA-6AED512V, Arrow Part Number=ERA-6AED512V, Arrow Price/Stock=https://www.arrow.com/en/products/era-6aed512v/panasonic?region=nac, Datasheet Link=https://industrial.panasonic.com/cdbs/www-data/pdf/RDM0000/AOA0000C307.pdf, Height=0.6mm, Manufacturer_Part_Number=ERA-6AED512V, Mouser Price/Stock=https://www.mouser.co.uk/ProductDetail/Panasonic/ERA-6AED512V?qs=MNPzkKEzRtSyMhgZIjuV%252BA%3D%3D
R4 R5 R6 R20: library part ERA-3AEB471V, "Resistor", Manufacturer_Name=Panasonic, Mouser Part Number=667-ERA-3AEB471V, Arrow Part Number=ERA-3AEB471V, Arrow Price/Stock=https://www.arrow.com/en/products/era3aeb471v/panasonic, Datasheet Link=https://industrial.panasonic.com/cdbs/www-data/pdf/RDM0000/AOA0000C307.pdf, Height=0.55mm, Manufacturer_Part_Number=ERA-3AEB471V, Mouser Price/Stock=https://www.mouser.co.uk/ProductDetail/Panasonic/ERA-3AEB471V?qs=1VWA5LkbEaqH3cm2W5TUkw%3D%3D
R11 R13: library part RC0402JR-071ML, "Resistor", Manufacturer_Name="Yageo Group", Mouser Part Number=603-RC0402JR-071ML, Arrow Part Number=RC0402JR-071ML, Arrow Price/Stock=https://www.arrow.com/en/products/rc0402jr-071ml/yageo, Datasheet Link=http://www.yageo.com/documents/recent/PYu-RC0402_51_RoHS_L_6_r.pdf, Height=0.4mm, Manufacturer_Part_Number=RC0402JR-071ML, Mouser Price/Stock=https://www.mouser.co.uk/ProductDetail/Yageo/RC0402JR-071ML/?qs=uM1JSSdPjOCNcwoUm19Cag%3D%3D
R17 R18 R19 R21 R22 R23 R24 R26 R27: library part CRCW060347R0FKEA, "Resistor", Manufacturer_Name=Vishay, Mouser Part Number=71-CRCW0603-47-E3, Arrow Part Number=CRCW060347R0FKEA, Arrow Price/Stock=https://www.arrow.com/en/products/crcw060347r0fkea/vishay, Datasheet Link=http://www.vishay.com/docs/20035/dcrcwe3.pdf, Height=0.5mm, Manufacturer_Part_Number=CRCW060347R0FKEA, Mouser Price/Stock=https://www.mouser.co.uk/ProductDetail/Vishay-Dale/CRCW060347R0FKEA?qs=iDmGvCT5Yjyx0QVXsg7Ljw%3D%3D
S1 S2: "Switch", Manufacturer_Name="ALPS Electric", Mouser Part Number=688-SKRKAEE020, Datasheet Link=http://www.alps.com/prod/info/J/HTML/Tact/SurfaceMount/SKRK/SKRKAEE020.html, Height=2mm, Manufacturer_Part_Number=SKRKAEE020, Mouser Price/Stock=https://www.mouser.co.uk/ProductDetail/Alps-Alpine/SKRKAEE020?qs=MrosSN5%252BUQW89XjXIp8Ugw%3D%3D

## Free pads (board coordinates)
  round 0.6 hole 0.3: 1(190,65)
  round 2.54 hole 2.54 unplated: attach(172.136,45.771) attach(172.136,137.846) attach(224.536,45.771) attach(224.536,137.846)

## Via types
v1: diameter 0.6, hole 0.3, Top Layer to Bottom Layer, tented both sides, 295 vias
v2: diameter 0.6, hole 0.3, Top Layer to Bottom Layer, 54 vias
v3: diameter 1.27, hole 0.711, Top Layer to Bottom Layer, 5 vias

## Nets (pads, with @x,y where several pads share a name; then routed paths per layer and width w, separated by ;. In a path a pad name is that pad's centre, name@x,y a point inside that pad or via, vN(x,y) a via of type N, cw(c..) or ccw(c..) an arc to the next point about the centre after c; other vN are vias at no path point)
+3.3V_A: C24.2 C25.2 C28.1 C38.2 C39.2 C40.2 IC5.5 IC6.1 IC6.8 PS1.5 R4.2 R14.2 | length 60.9
  Top Layer w0.254: C38.2 IC6.1@183.643,82.878 ; IC6.1 IC6.1@183.643,82.878 ; 183.643,83.413 IC6.1@183.643,82.878 ; IC6.8 188.193,81.771 188.838,81.126 C39.2 ; PS1.5 194.452,82.895 194.691,83.134 R4.2@194.691,86.716
  Top Layer w0.4: C24.2@179.757,69.699 180.365,70.307 R14.2
  Top Layer w0.45: 183.643,83.413 183.643,83.719 ; IC6.8 188.193,84.053 188.29,84.15
  Top Layer w0.5: IC5.5 177.817,69.699 C24.2 ; C24.2@179.757,69.699 C24.2 ; C40.2 183.381,82.619 ; 183.49,84.15 188.29,84.15 191.033,84.15 192.288,82.895 PS1.5@193.319,82.895 ; PS1.5 193.746,80.6 C28.1 195.047,80.061 196.825,78.283 196.825,72.136 194.005,69.317 179.757,69.317 C24.2
+3.3V_D: C1.2 C2.1 C5.1 FB2.1 FB3.2 IC1.2 IC3.2 J2.4 J6.2 J7.1 J8.1 J9.1 R1.2 R5.2 R7.2 R8.2 R9.2 | length 233.5
  Top Layer w0.254: J7.1 170.586,89.459 169.977,90.068 169.977,99.314 170.586,99.924 J8.1 170.002,101.541 170.002,114.2 J2.4 ; R9.2 175.158,116.815 174.161,115.817 J2.4 ; R8.2 177.241,100.076 v3(177.267,100.051) 185.522,100.051 186.029,100.558 ; R5.2 192.075,102.891 ; J9.1 205.175,139.573 195.471,139.573 J6.2 191.966,139.675 176.047,139.675 174.6,138.227 174.6,134.031 R7.2 170.988,133.65 169.875,132.537 169.875,116.332 170.39,115.817 J2.4
  Top Layer w0.4: IC1.2 199.086,113.486 C2.1 C2.1@201.244,113.486 ; v3(202.159,126.238) 211.811,126.238 213.411,124.638 213.411,93.447 214.245,92.612 FB2.1
  Top Layer w0.5: IC3.2 188.468,108.89 196.317,116.738 v3(196.317,124.358) ; C5.1 197.913,105.787 198.552,106.426 R1.2
  Top Layer w0.9: C1.2 194.114,111.691 195.936,113.513 IC1.2
  Top Layer w1: FB3.2 179.07,95.529 181.254,97.714 186.385,97.714 186.385,98.206 ; IC3.2 188.468,105.787 C5.1 194.114,106.643 C1.2
  Bottom Layer w0.254: J8.1@171.455,100.051 v3(177.267,100.051)
  Bottom Layer w0.4: v3(196.317,124.358) 198.196,126.238 v3(202.159,126.238)
+5V: C6.1 C7.1 C17.1 C19.2 IC2.5 IC3.3 J1.A4_B9 J1.B4_A9 L1.1 | length 80.1
  Top Layer w0.5: J1.B4_A9 213.117,135.774 214.122,136.779 216.891,136.779 217.917,135.753 J1.A4_B9 ; IC2.5 IC2.5@215.498,129.499
  Top Layer w0.6: 217.917,133.746 J1.A4_B9
  Top Layer w0.7: 217.917,133.746 218.186,133.477 219.224,133.477 219.224,130.708
  Top Layer w0.8: v3(201.275,130.708) 219.253,130.708 219.253,127.94 C17.1
  Top Layer w1: C6.1@181.026,107.108 181.562,107.644 C7.1 ; C7.1@184.176,107.643 IC3.3
  Top Layer w1.2: IC3.3 186.178,124.659 188.697,127.178 v3(196.063,127.178)
  Top Layer w2: C17.1 218.912,127.345 218.912,124.902 L1.1
  Bottom Layer w1: v3(196.063,127.178) 196.063,127.229 199.542,130.708 v3(201.275,130.708)
+5V_A: C14.2 C15.2 C21.2 C22.2 C27.1 C29.2 C34.2 C35.2 FB1.2 IC4.5 IC7.3 PS1.1 PS1.3 R10.2 | length 89.7
  Top Layer w0.254: PS1.1 195.616,82.895 195.296,83.215 195.296,84.552 195.539,84.795 PS1.3
  Top Layer w0.4: IC7.3 217.379,86.242 217.894,85.727 C34.2
  Top Layer w0.5: C34.2 218.128,85.53 C35.2
  Top Layer w0.6: PS1.1 197.838,82.895 197.855,82.895 C29.2 ; IC4.5 C14.2@204.003,78.664 ; 210.21,70.968 R10.2
  Top Layer w0.7: C29.2@197.792,82.942 197.838,82.895 199.796,80.937 C27.1 ; C14.2 C15.2
  Top Layer w0.8: C35.2 221.522,85.53 221.522,92.787 C21.2 ; FB1.2@225.243,92.793 FB1.2
  Top Layer w1: C15.2 199.873,80.137 C27.1 201.955,77.902 201.955,72.187 203.175,70.968 210.21,70.968 223.901,70.968 225.273,72.339 FB1.2 ; C22.2 223.063,92.793 FB1.2@225.243,92.793
ADC_DATA: IC1.7 R17.2 | length 35.6
  Top Layer w0.254: IC1.7 205.664,119.863 207.422,118.104 207.422,91.69 R17.2
Audio_IN: C41.1 IC4.1 IC4.4 | length 10.2
  Top Layer w0.2: IC4.1 IC4.1@204.003,75.113
  Top Layer w0.3: IC4.1@204.003,75.113 IC4.4 209.84,77.013 210.603,77.776 C41.1
Audio_OUT: C26.2 R25.1 R28.2 | length 6.8
  Top Layer w0.254: R25.1 R28.2 190.699,74.553 C26.2
BCK_ADC: IC1.8 R18.2 | length 2.7
  Top Layer w0.254: IC1.8 201.773,121.133 R18.2
BCK_DAC: IC1.6 R26.1 | length 2.6
  Top Layer w0.254: IC1.6 R26.1@201.638,118.593
CS_DSP: IC1.23 J6.7 | length 10.3
  Top Layer w0.254: J6.7 187.134,132.006 IC1.23
D+: IC2.3 J1.A6 J1.B6 | length 6.1
  Top Layer w0.254: IC2.3 214.498,133.243 214.767,133.512 J1.B6 214.767,135.894 214.916,136.042 215.595,136.042 215.744,135.894 215.744,134.989 J1.A6
D+ESP: IC1.14 IC2.4 | length 16.5
  Top Layer w0.254: IC1.14 200.177,128.753 200.584,128.346 214.198,128.346 214.498,128.646 IC2.4
D-: IC2.1 J1.A7 J1.B7 | length 5.5
  Top Layer w0.254: J1.A7 215.267,133.653 215.508,133.412 216.267,133.412 ; J1.B7 216.267,133.412 ; IC2.1 216.398,133.281 216.267,133.412
D-ESP: IC1.13 IC2.6 | length 18.8
  Top Layer w0.254: IC1.13 200.076,127.483 200.457,127.864 215.925,127.864 216.398,128.336 IC2.6
DAC_DATA: IC1.5 R19.1 | length 2.7
  Top Layer w0.254: IC1.5 201.434,117.323 R19.1
DC_DSP: IC1.22 J6.6 | length 9.8
  Top Layer w0.254: J6.6 188.404,133.236 IC1.22
EN: C3.1 IC1.3 R1.1 S1.2 | length 14.1
  Top Layer w0.254: IC1.3 199.212,114.63 201.854,114.63 202.166,114.318 202.166,109.71 201.803,109.347 C3.1 200.456,107.671 200.456,105.324 S1.2
ENC_A: IC1.31 J2.1 | length 10.1
  Top Layer w0.254: J2.1 171.975,123.673 IC1.31
ENC_B: IC1.32 J2.2 | length 10.6
  Top Layer w0.254: J2.2 173.129,122.326 181.483,122.326 IC1.32
ENC_SW: IC1.33 J2.3 | length 11.1
  Top Layer w0.254: J2.3 174.435,121.133 IC1.33
GND: C1.1 C2.2 C3.2 C4.2 C5.2 C6.2 C7.2 C8.1 C9.1 C10.1 C11.1 C12.1 C13.1 C14.1 C15.1 C17.2 C18.2 C19.1 C20.2 C21.1 C22.1 C23.1 C24.1 C25.1 C27.2 C28.2 C29.1 C30.2 C31.1 C32.1 C33.1 C34.1 C35.1 C36.1 C37.1 C38.1 C39.1 C40.1 C42.1 C43.1 C45.1 C46.1 C47.1 C48.1 C49.2 IC1.1 IC1.40 IC1.41 IC1.42 IC1.43 IC1.44 IC1.45 IC1.46 IC1.47 IC1.48 IC1.49 IC2.2 IC3.1 IC4.2 IC5.2 IC6.3 IC6.9 IC6.10 IC6.11 IC6.12 IC6.16 IC6.19 IC7.2 IC7.5 J1.A1_B12 J1.B1_A12 J1.S1 J1.S2 J1.S3 J1.S4 J2.5 J3.1 J4.1 J5.1 J6.1 J7.3 J8.3 J9.3 J10.1 J10.2 J10.3 J10.5 J10.6 J11.1 J11.2 J11.3 J11.5 J11.6 LED1.1 LED2.1 LED3.1 pad.1 pad.attach@172.136,45.771 pad.attach@172.136,137.846 pad.attach@224.536,45.771 PS1.2 R2.1 R3.1 R12.1 R15.1 R28.1 R29.1 R30.1 R31.1 R32.1 S1.1 S2.1 | length 4.2
  Top Layer w0.2: 220.375,133.239 220.533,133.239
  Top Layer w0.254: S2.1@176.886,130.404 177.14,130.15 C4.2 ; IC6.19@184.291,88.534 IC6.19 ; IC6.9 IC6.10 ; IC6.12 IC6.11
  other v1: 175,45 180,45 185,45 190,45 195,45 200,45 205,45 210,45 215,45 172.5,50 177.5,50 192.5,50 197.5,50 202.5,50 212.5,50 217.5,50 222.5,50 227.5,50 170,55 175,55 180,55 185,55 190,55 195,55 200,55 205,55 210,55 215,55 220,55 225,55 172.5,60 177.5,60 182.5,60 187.5,60 192.5,60 197.5,60 202.5,60 207.5,60 217.5,60 222.5,60 227.5,60 170,65 175,65 180,65 185,65 195,65 200,65 205,65 210,65 215,65 220,65 225,65 178.427,67.98 193.312,68.133 184.955,68.184 219.143,69.403 212.285,69.454 172.5,70 197.5,70 202.5,70 227.5,70 183.456,70.597 174.414,71.003 194.056,71.044 169.639,71.181 179.24,72.273 214.198,72.365 171.976,72.502 203.599,72.705 208.196,72.832 218.559,72.883 177.013,73.381 223.182,73.492 175.039,73.685 194.285,73.812 199.796,74.386 170,75 185,75 182.474,75.311 191.618,75.438 173.779,75.524 226.941,75.575 208.353,75.968 222.801,76.591 195.123,77.089 219.468,77.334 212.293,77.495 215.062,77.699 181.729,78.293 218.305,79.258 192.5,80 197.5,80 207.5,80 212.5,80 222.5,80 227.5,80 173.728,80.757 219.939,81.737 192.473,81.874 201.905,81.915 214.909,82.093 190.398,82.271 223.03,83.043 199.466,83.058 218.11,83.109 180.086,83.744 176.319,84.211 170,85 180,85 185,85 190,85 200,85 215,85 208.552,85.1 187.706,85.115 227.144,85.202 197.833,85.252 182.352,85.329 213.233,86.03 222.682,86.436 186.741,86.995 192.1,86.995 214.808,87.046 189.197,87.081 178.402,87.132 184.277,87.173 220.472,87.528 212.242,87.808 223.969,88.072 195.072,88.671 201.727,89.459 189.222,89.799 186.055,89.941 177.5,90 192.5,90 197.5,90 222.5,90 227.5,90 210.236,90.195 220.464,90.739 213.541,91.762 191.534,91.806 216.992,91.821 182.659,91.867 195.318,91.882 199.839,91.882 171.595,92.06 204.361,92.339 211.099,92.431 185.028,92.566 218.669,92.761 192.354,93.472 200.177,93.472 196.266,93.497 177.183,93.634 209.626,94.004 212.598,94.031 202.514,94.361 181.61,94.386 191.643,94.971 199.466,94.971 185,95 195.555,94.996 215,95 218.534,95.336 206.4,95.453 188.435,95.946 204.572,96.469 202.54,96.495 211.125,96.545 182.601,96.647 208.153,96.645 221.429,96.656 177.97,98.054 200.728,98.46 181.043,99.095 206.654,99.365 203.751,99.501 209.626,99.491 212.598,99.518 197.5,100 217.5,100 227.5,100 215.156,100.543 194.048,100.924 180.586,101.407 211.125,102.032 208.153,102.132 205.232,102.183 171.442,102.702 200.355,102.895 182.702,103.988 179.24,104.15 206.654,104.852 203.751,104.988 209.626,104.978 185,105 212.598,105.005 215,105 220,105 211.125,107.519 208.153,107.619 205.232,107.67 215.206,108.189 183.964,109.738 187.5,110 192.5,110 217.5,110 227.5,110 206.654,110.339 203.751,110.475 209.626,110.465 212.573,110.49 171.417,110.805 195.979,110.983 199.085,110.998 211.125,113.006 208.153,113.106 205.232,113.157 203.796,114.066 175,115 185,115 185,115 190,115 190,115 215,115 220,115 225,115 196.69,115.148 206.654,115.826 209.626,115.951 212.598,115.978 193.21,116.596 188.409,117.053 204.724,117.223 206.019,118.29 211.125,118.493 207.569,119.507 194.912,119.542 214.571,119.974 187.5,120 187.5,120 197.5,120 197.5,120 212.5,120 217.5,120 222.5,120 227.5,120 208.813,121.134 212.598,121.465 183.896,121.717 206.121,121.947 210.006,122.726 192.321,122.895 188.511,122.921 204.8,123.622 207.543,123.647 211.587,124.462 175,125 180,125 185,125 185,125 190,125 190,125 195,125 195,125 210,125 215,125 225,125 208.108,125.275 205.029,125.298 171.544,126.4 213.106,126.873 216.417,126.994 204.564,127.035 209.263,127.137 184.023,127.533 225.281,127.807 202.456,129.321 206.578,129.337 210.736,129.499 222.5,130 227.5,130 178.503,132.319 207.891,132.344 203.802,132.42 173.279,132.461 196.512,132.801 180.95,134.29 195,135 200,135 205,135 210,135 225,135 177.597,138.1
  other v2: 175,45 180,45 185,45 190,45 195,45 200,45 205,45 210,45 215,45 220.32,45.034 172.5,50 177.5,50 192.5,50 197.5,50 202.5,50 212.5,50 217.5,50 222.5,50 227.5,50 184.643,50.031 170,55 175,55 180,55 185,55 190,55 195,55 200,55 205,55 210,55 215,55 220,55 225,55 172.5,60 177.5,60 182.5,60 187.5,60 192.5,60 197.5,60 202.5,60 207.5,60 217.5,60 222.5,60 227.5,60 170,65 175,65 180,65 185,65 195,65 200,65 205,65 210,65 215,65 220,65 225,65
IO0: C4.1 IC1.27 S2.2 | length 7
  Top Layer w0.254: S2.2 176.886,126.094 176.886,127.813 177.775,128.702 179.527,128.702 181.508,128.702 IC1.27
LRCK_ADC: IC1.10 R21.2 | length 3
  Top Layer w0.254: IC1.10 200.152,123.673 200.914,124.435 R21.2
LRCK_DAC: IC1.4 R24.1 | length 2.8
  Top Layer w0.254: IC1.4 R24.1@201.905,116.053
NetC16_1: C16.1 J10.7 | length 24.8
  Top Layer w0.8: C16.1 205.918,66.269 220.929,51.257 J10.7
NetC16_2: C16.2 IC4.3 R11.1 | length 3.9
  Top Layer w0.2: C16.2@205.903,72.25 C16.2
  Top Layer w0.254: IC4.3 R11.1
  Top Layer w0.6: C16.2@205.903,72.25 IC4.3
NetC20_1: C20.1 FB1.1 L1.2 | length 21
  Top Layer w0.254: L1.2 L1.2@222.301,111.614
  Top Layer w1: C20.1 224.13,107.29 225.273,106.147 FB1.1
  Top Layer w2: C20.1 L1.2@222.301,111.614
NetC26_1: C26.1 IC5.3 R13.1 | length 14.4
  Top Layer w0.254: IC5.3 175.91,73.243 176.676,74.009 178.74,74.009 R13.1 178.937,74.437 181.722,74.437 184.785,71.374 C26.1
NetC32_2: C32.2 C33.2 FB2.2 IC7.4 | length 8
  Top Layer w0.254: FB2.2 FB2.2@215.251,90.998
  Top Layer w0.4: FB2.2@215.251,90.998 216.19,90.998 218.222,88.966 C33.2 218.547,88.844 218.162,88.459 C32.2 218.162,87.453 217.601,86.892 IC7.4
NetC36_2: C36.2 C37.2 FB3.1 IC6.20 R16.2 | length 9.8
  Top Layer w0.254: FB3.1 179.07,90.653 179.07,88.968 179.493,88.544 R16.2 ; IC6.20@183.631,88.544 IC6.20
  Top Layer w0.45: IC6.20@183.631,88.544 C36.2
  Top Layer w0.5: FB3.1 179.453,90.509 C37.2@181.567,90.509 ; C37.2 181.678,90.398 183.557,90.398 C36.2
NetC41_2: C41.2 R22.1 | length 2.3
  Top Layer w0.254: C41.2@208.725,79.746 C41.2
  Top Layer w0.4: C41.2@208.725,79.746 R22.1
NetC42_2: C42.2 R20.1 R25.2 | length 3.1
  Top Layer w0.6: R25.2 187.543,77.689 187.543,79.491 188.826,79.491 C42.2@188.838,79.479
NetC43_2: C43.2 IC7.14 R23.2 | length 3.5
  Top Layer w0.4: R23.2@208.728,83.477 C43.2 ; C43.2@210.763,83.477 IC7.14
NetC44_1: C44.1 IC6.4 | length 2.6
  Top Layer w0.254: C44.1 185.116,80.709 185.358,80.952 185.358,81.358 185.593,81.593 IC6.4
NetC44_2: C44.2 IC6.2 | length 2.8
  Top Layer w0.254: C44.2 183.264,80.544 184.293,81.573 IC6.2
NetC45_2: C45.2 C46.2 IC7.1 | length 2.9
  Top Layer w0.254: C46.2 216.503,82.05 IC7.1
NetC47_2: C47.2 C48.2 IC6.18 | length 5.8
  Top Layer w0.254: IC6.18 184.952,88.541 C47.2 185.193,90.324 186.03,91.161 186.03,93.238 C48.2
NetC49_1: C49.1 IC6.5 | length 5.9
  Top Layer w0.254: C49.1@185.395,77.445 186.031,77.445 186.243,77.657 IC6.5
NetIC5_1: IC5.1 IC5.4 J11.7 | length 6.1
  Top Layer w0.254: IC5.4 177.81,71.592 IC5.1
  Top Layer w0.8: J11.7 174.955,68.737 IC5.4
NetIC6_7: IC6.7 R20.2 | length 1.6
  Top Layer w0.254: 187.543,81.042 IC6.7
NetIC6_13: IC6.13 R26.2 | length 45.9
  Top Layer w0.254: IC6.13 188.193,90.25 190.678,92.735 201.981,92.735 205.943,96.698 205.943,117.043 204.419,118.567 R26.2
NetIC6_14: IC6.14 R19.2 | length 42.7
  Top Layer w0.254: IC6.14 187.543,91.048 190.729,94.234 201.346,94.234 204.549,97.437 204.549,116.228 203.708,117.069 R19.2
NetIC6_15: IC6.15 R24.2 | length 39.7
  Top Layer w0.254: IC6.15 186.893,91.922 190.678,95.707 200.711,95.707 203.043,98.04 203.043,115.425 R24.2
NetIC6_17: IC6.17 R16.1 | length 7.2
  Top Layer w0.254: R16.1 182.143,86.927 182.619,86.451 185.309,86.451 185.593,86.735 IC6.17
NetIC7_6: IC7.6 R27.2 | length 44.7
  Top Layer w0.254: R27.2@203.316,122.784 208.432,122.784 210.388,120.828 210.388,91.43 213.626,88.192 IC7.6
NetIC7_7: IC7.7 R21.1 | length 45.8
  Top Layer w0.254: R21.1 209.702,124.435 211.861,122.276 211.861,91.796 214.815,88.842 IC7.7
NetIC7_8: IC7.8 R18.1 | length 38.2
  Top Layer w0.254: R18.1@203.326,121.118 207.634,121.118 208.915,119.837 208.915,90.068 210.141,88.842 IC7.8
NetIC7_9: IC7.9 R17.1 | length 4.5
  Top Layer w0.254: R17.1 207.518,89.419 207.518,89.256 208.581,88.192 IC7.9
NetIC7_10: IC7.10 R31.2 | length 6.6
  Top Layer w0.254: R31.2@204.971,89.433 205.588,89.433 207.479,87.542 IC7.10
NetIC7_11: IC7.11 R30.2 | length 5.7
  Top Layer w0.254: R30.2@205.105,86.892 IC7.11
NetIC7_12: IC7.12 R32.2 | length 6.5
  Top Layer w0.254: R32.2@204.673,85.294 206.63,85.294 207.578,86.242 IC7.12
NetIC7_13: IC7.13 R29.2 | length 4.4
  Top Layer w0.2: IC7.13 212.528,85.592 213.335,84.785 R29.2
NetJ1_A5: J1.A5 R3.2 | length 3.2
  Top Layer w0.254: J1.A5 216.79,134.943 216.79,133.52 R3.2
NetJ1_B5: J1.B5 R2.2 | length 3.1
  Top Layer w0.254: R2.2 213.012,132.868 213.539,132.868 213.767,133.097 J1.B5
NetLED1_2: LED1.2 R4.1 | length 1.7
  Top Layer w0.254: R4.1@196.088,86.69 LED1.2@197.754,86.69
  Top Layer w0.6: LED1.2@198.274,86.716 LED1.2
NetLED2_2: LED2.2 R5.1
NetLED3_2: LED3.2 R6.1 | length 1.7
  Top Layer w0.4: R6.1 LED3.2@175.678,136.852
NetR22_2: R22.2 R23.1 | length 1.5
  Top Layer w0.4: R22.2 R23.1
PB1: C11.2 IC1.34 J3.2 R8.1 | length 57.1
  Top Layer w0.254: J3.2 171.518,76.41 170.427,76.41 169.958,76.879 169.958,80.525 175.755,86.322 175.755,103.619 R8.1@177.062,104.926 ; R8.1@176.987,104.988 R8.1 177.241,107.645 179.984,110.388 183.083,110.388 183.845,111.15 183.845,118.897 182.88,119.863 IC1.34 C11.2
PB2: C12.2 IC1.35 J4.2 R9.1 | length 19.8
  Top Layer w0.254: J4.2 173.025,106.771 173.025,109.855 175.895,112.725 175.895,115.418 176.213,115.735 178.118,115.735 178.928,116.545 R9.1 178.928,118.299 C12.2 181.432,118.466 IC1.35
PB3: C13.2 IC1.25 J5.2 R7.1 | length 18.2
  Top Layer w0.254: J5.2 173.299,128.747 174.981,130.429 R7.1 175.387,131.75 177.013,133.375 180.772,133.375 182.804,133.375 183.425,132.754 C13.2 183.794,132.41 184.555,131.649 184.555,130.042 IC1.25
POT1: C8.2 IC1.39 J7.2 | length 34.2
  Top Layer w0.254: J7.2 174.36,86.959 174.752,87.351 174.752,106.807 179.299,111.354 179.299,113.132 C8.2 181.534,113.538 IC1.39
POT2: C9.2 IC1.38 J8.2 | length 23.8
  Top Layer w0.254: J8.2 172.582,97.424 173.126,97.968 173.863,98.704 173.863,107.594 178.184,111.915 178.184,114.201 C9.2 179.019,114.783 IC1.38
POT3: C10.2 IC1.18 J9.2 | length 17.3
  Top Layer w0.254: IC1.18 193.473,130.014 C10.2 193.473,133.046 194.564,134.137 202.768,134.137 204.267,135.636 J9.2
RES_DSP: IC1.21 J6.5 | length 9.3
  Top Layer w0.254: J6.5 189.674,134.466 IC1.21
SCK: IC1.9 R27.1 | length 2.9
  Top Layer w0.254: IC1.9 200.33,122.403 200.711,122.784 R27.1
SCL_DSP: IC1.19 J6.3 | length 8.3
  Top Layer w0.254: J6.3 192.214,136.926 IC1.19
SDA_DSP: IC1.20 J6.4 | length 8.8
  Top Layer w0.254: J6.4 190.815,135.825 190.815,130.76 190.944,130.631 IC1.20
STATE: IC1.24 R6.2 | length 11.8
  Top Layer w0.254: R6.2@177.203,135.14 177.687,135.14 182.513,135.14 185.864,131.788 IC1.24
VREF1: C18.1 C23.2 R10.1 R11.2 R12.2 | length 8.5
  Top Layer w0.2: R12.2@212.283,74.513 R12.2 ; C18.1@214.833,74.549 C18.1
  Top Layer w0.254: R11.2 210.21,74.513 R12.2@212.283,74.513
  Top Layer w0.6: C23.2@212.319,75.858 R12.2 C18.1@214.833,74.549
VREF2: C30.1 C31.2 R13.2 R14.1 R15.2 | length 7.6
  Top Layer w0.254: C30.1 177.175,78.129 R15.2 178.553,75.463 178.782,75.692 180.467,75.692 C31.2
pads on no net: IC1.11 IC1.12 IC1.15 IC1.16 IC1.17 IC1.26 IC1.28 IC1.29 IC1.30 IC1.36 IC1.37 IC3.4 IC6.6 J1. J1.A8 J1.B8 PS1.4

## Polygon pours and split planes (outlines as drawn)
GND on Top Layer "GND_L01_P010" (solid, pour order 10): 167.97,141.554 228.397,141.554 228.397,41.605 167.97,41.605
GND on Top Layer "NONET_L01_P006" (solid, remove dead copper, shelved, pour order 6): 167.97,141.554 228.397,141.554 228.397,41.605 167.97,41.605
+3.3V_A on Top Layer "+3.3V_A_L01_P009" (solid, pour order 9): 181.712,83.134 182.143,83.566 182.143,84.48 182.956,84.48 183.871,84.48 183.871,82.245 183.718,82.093 181.712,82.093
+3.3V_D on Top Layer "+3.3V_D_L01_P008" (solid, pour order 8): 192.405,106.204 187.935,106.324 182.759,102.737 182.759,97.231 192.405,97.231
+5V on Top Layer "+5V_L01_P001" (solid, pour order 1): 215.15,130.046 214.623,130.759 216.242,130.759 215.748,130.048 215.163,130.048
GND on Bottom Layer "GND_L02_P007" (solid, remove dead copper, pour order 7): 167.97,141.554 228.397,141.554 228.397,41.605 167.97,41.605

## Other copper
Top Layer:
  pour cut-out: 211.496,89.252 211.559,89.314 212.504,89.314 212.822,88.996 211.752,88.996 211.752,89.074 211.594,89.233

## Silkscreen, mask and mechanical layers (free items; w line width, h text height)
Top Overlay:
  drawing of 257 lines, arcs and shapes, not listed
  text "<-- OUTPUT" at 174.803,46.736 h1.52
  text "<-- INPUT" at 209.169,46.736 h1.52
Bottom Overlay:
  drawing of 72 lines, arcs and shapes, not listed

## Text inside footprints (layer, text, board x,y; h text height)
J1: Mechanical 13 "PCB EDGE" at 210.317,141.616 h0.61 r180